# Altium PCB DataSampleHub.PcbDoc (part 1 of 3)
Units mil, origin at the board's own origin, x right, y up, seen from the top; angles counter-clockwise.
Board outline 7885.07 x 6309.28 mil, 2 copper layers (Top Layer, Bottom Layer), stack 65.792 mil thick; 360 components, 225 nets, 1247 pads, 854 vias.
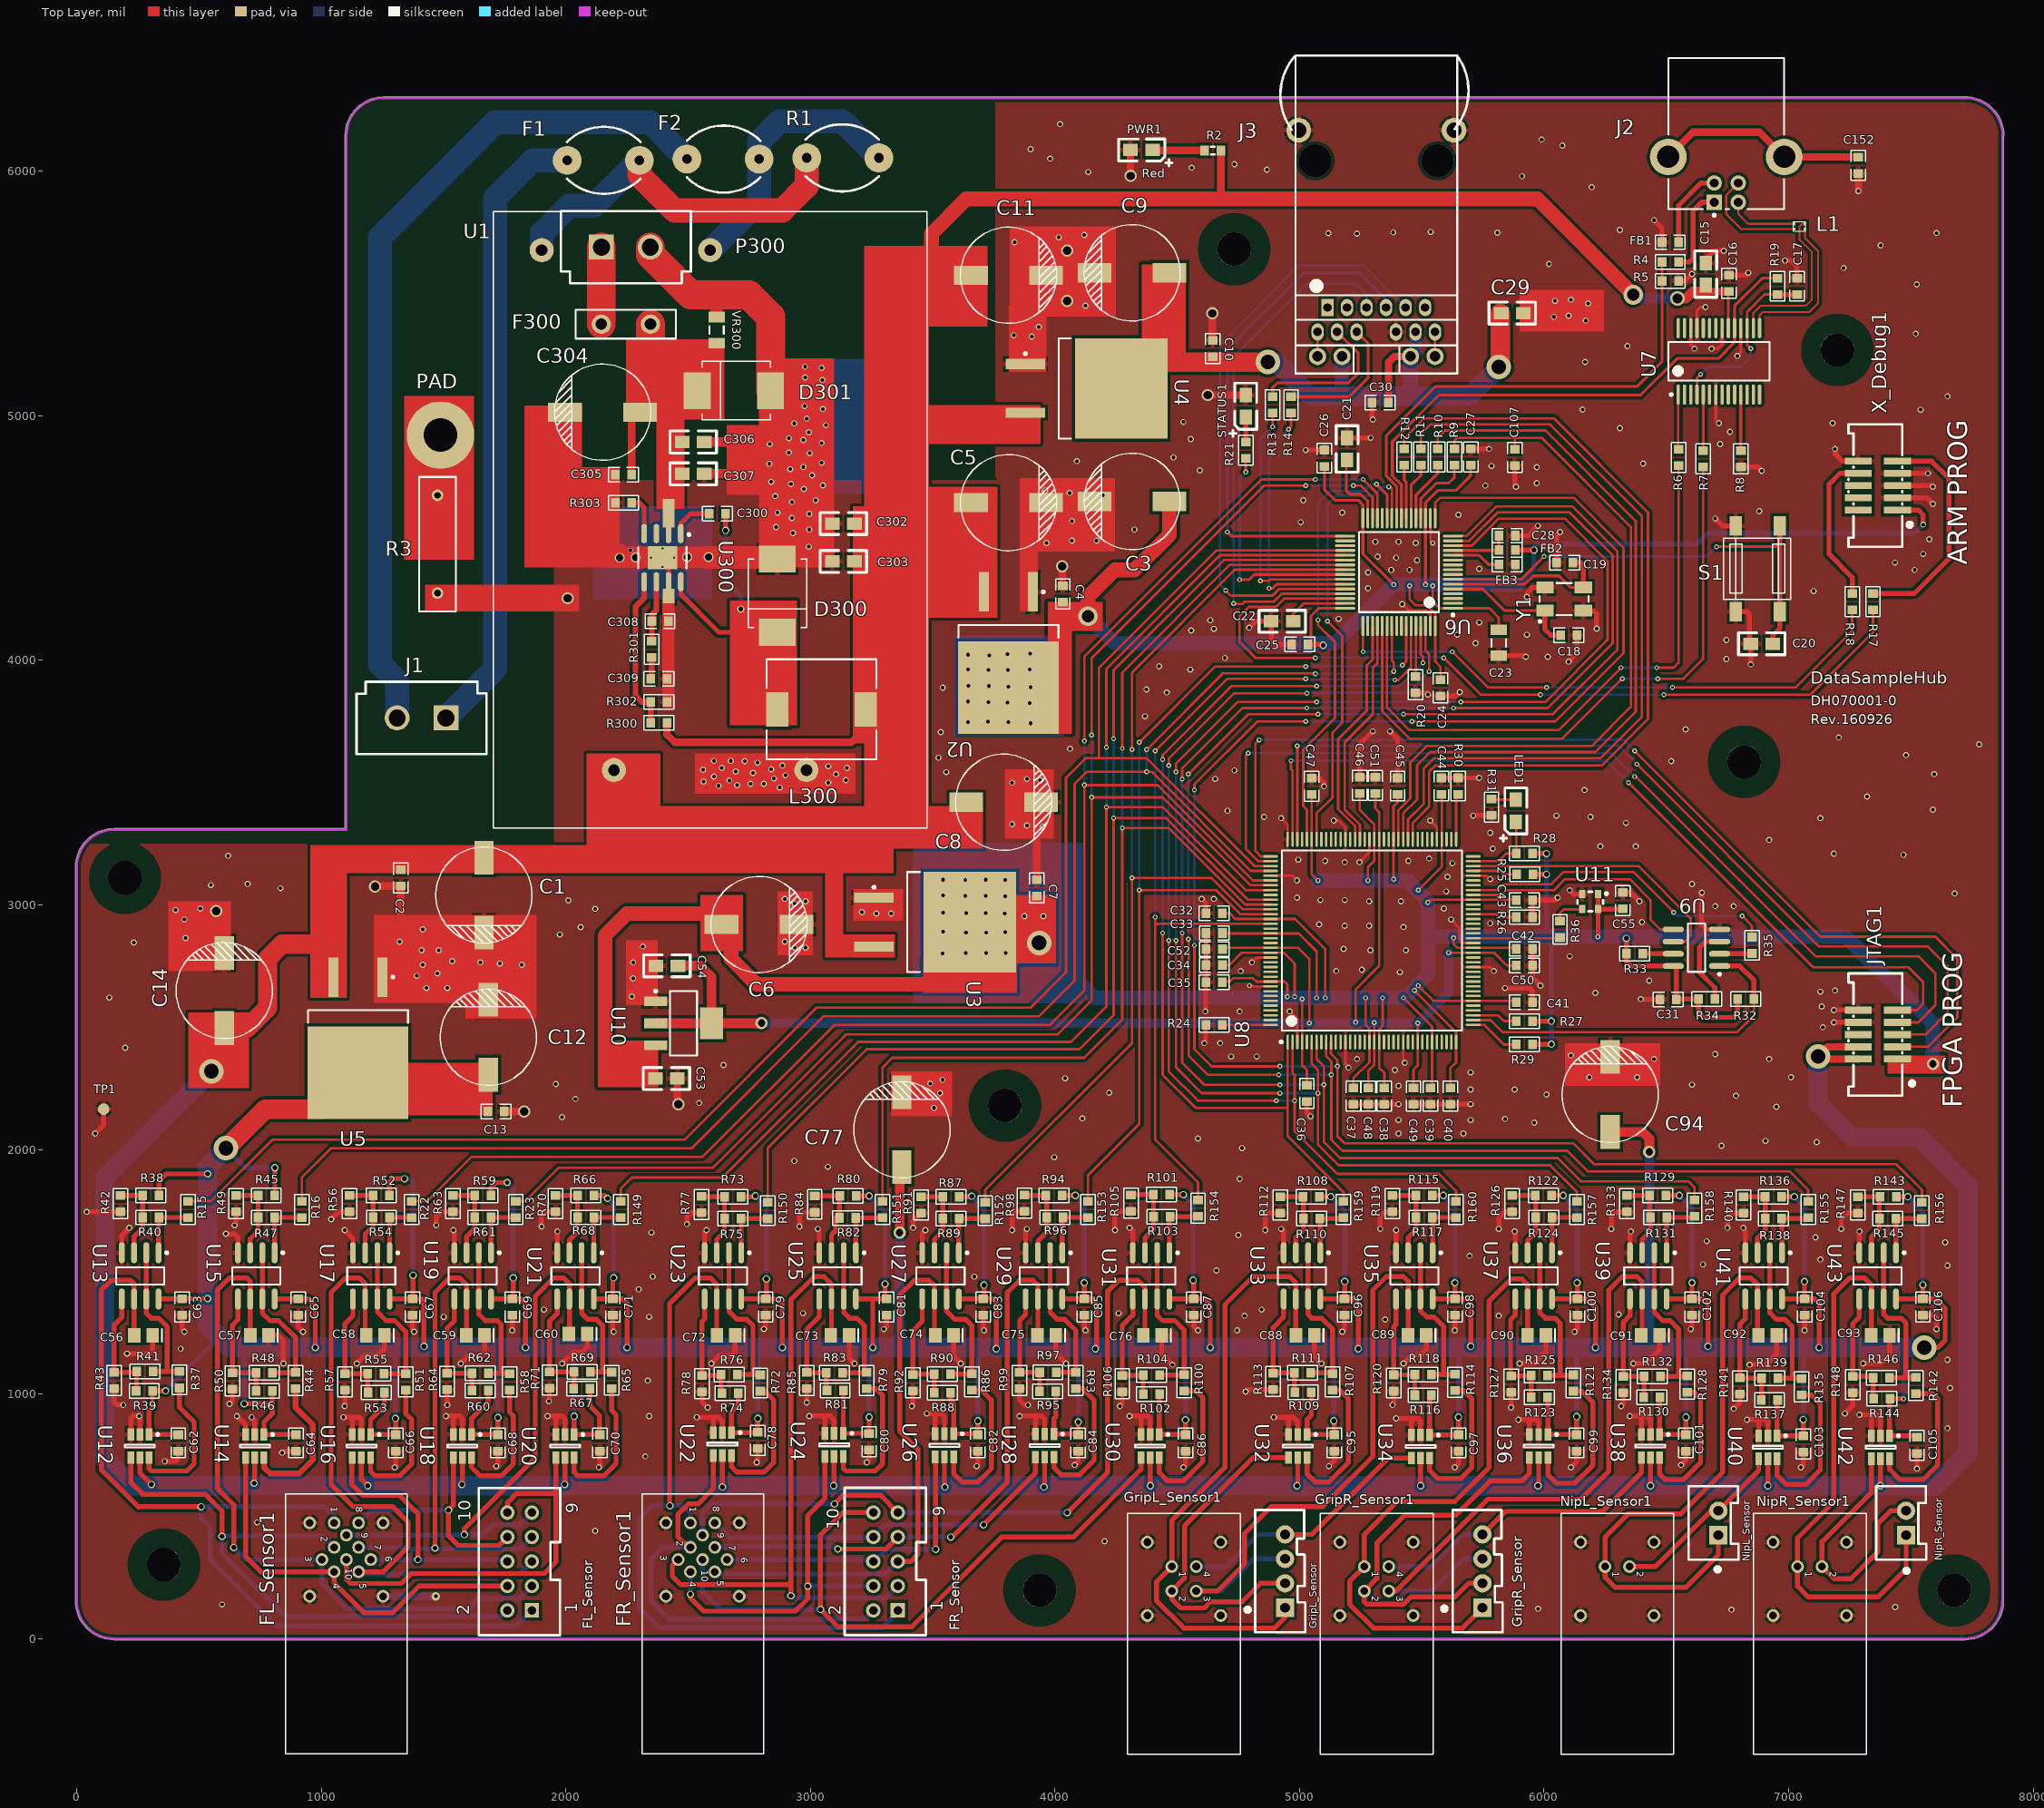
[diagram p0: Top Layer view]
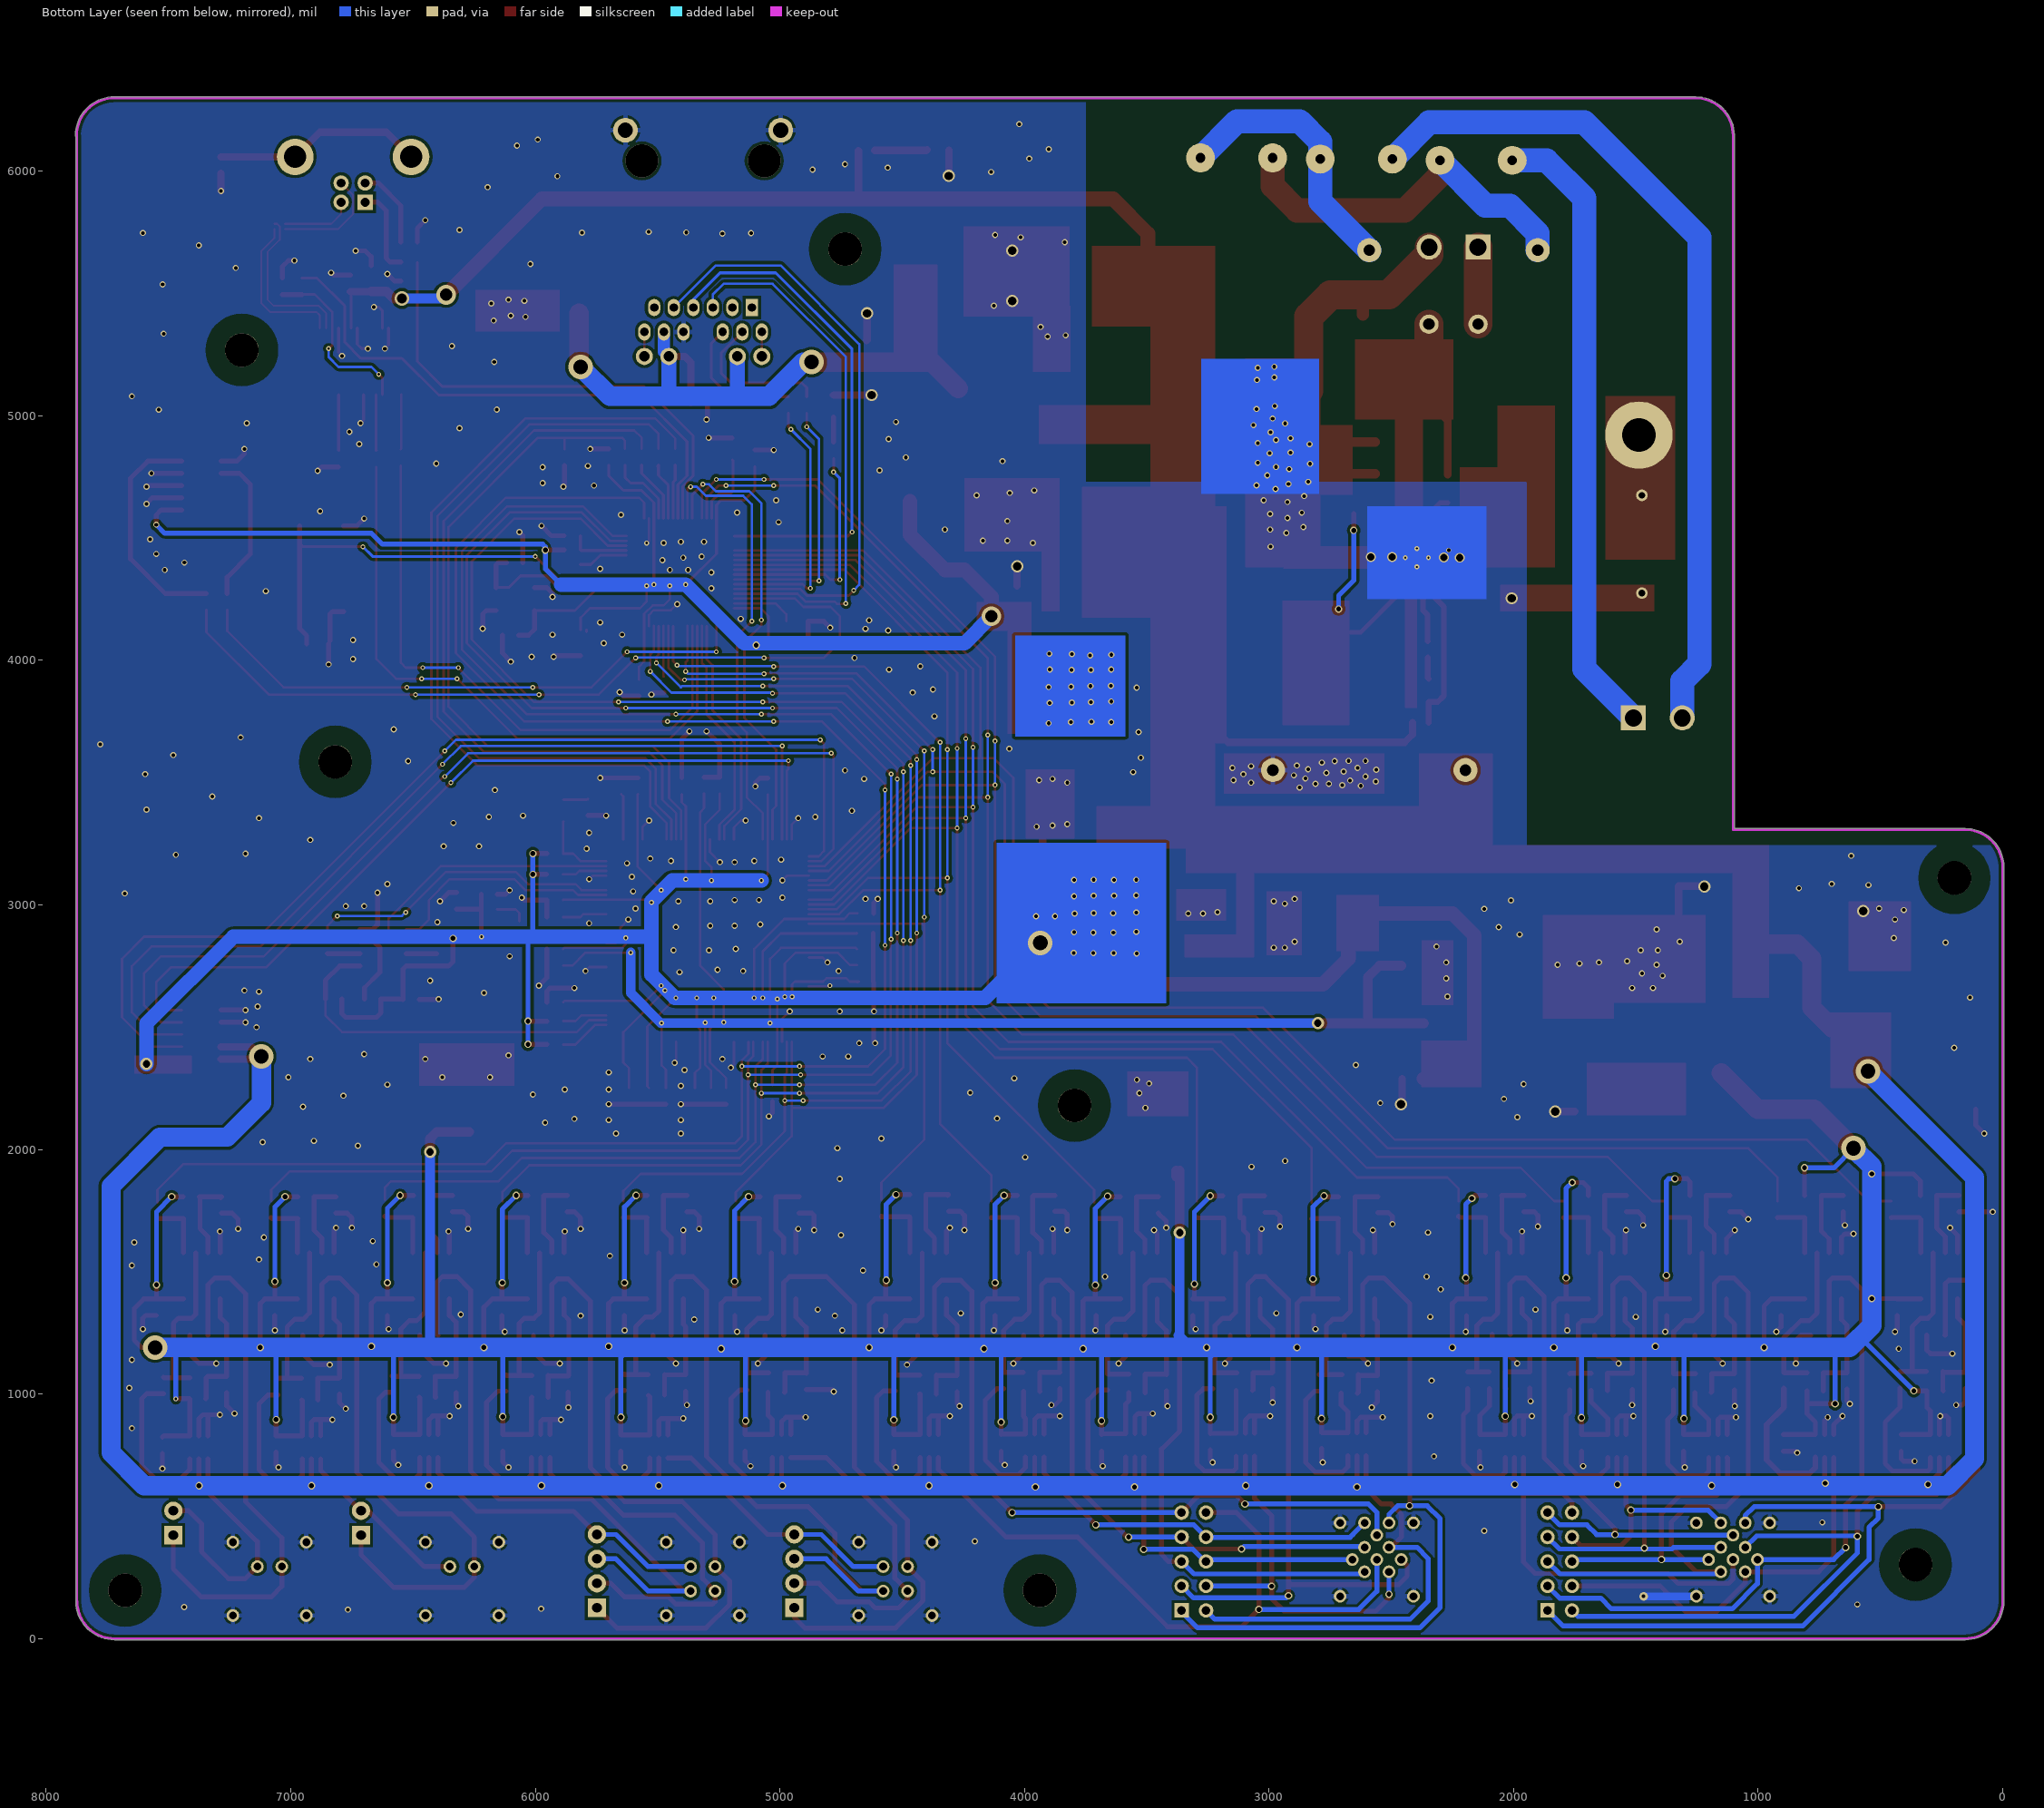
[diagram p1: Bottom Layer view, seen from below]

## Layer stack, top to bottom
Top Solder: solder mask 0.4, Solder Resist, Dk 3.5
Top Layer: signal copper 1.4
Dielectric1: core 62.9921, FR-4, Dk 4.8
Bottom Layer: signal copper 1.4
Bottom Solder: solder mask 0.4, Solder Resist, Dk 3.5

## Board outline
-5.04,152.5 cw(c-0.02,152.5) -5.01,152.95 -5.01,3152.56 cw(c0,3152.56) -4.86,3153.82 cw(c0.09,3154.67) -4.93,3154.67 cw(c152.61,3154.67) 152.61,3312.2 cw(c152.61,3307.19) 153.62,3312.1 1097.35,3312.1 1097.35,6146.69 cw(c1102.36,6146.69) 1097.47,6147.79 cw(c1255,6146.69) 1255,6304.23 7722.05,6304.23 cw(c7722.5,6299.23) 7722.5,6304.25 cw(c7722.5,6146.71) 7880.04,6146.71 cw(c7875.02,6146.71) 7879.03,6143.7 7879.03,152.52 cw(c7874.02,152.52) 7878.52,150.32 cw(c7721,152.52) 7721,-5.01 cw(c7721,0) 7720.92,-5.01 152.96,-5.01 cw(c152.5,-0.02) 152.5,-5.04 cw(c152.5,152.5)

## Design rules (kind name [scope] priority, off if disabled: settings)
Clearance Poly_NoNet [IsPAD and Not InNet('') and Not InAnyComponent] p1: gap=78.74
Clearance Clearance_1 [All] p2: gap=7
Height [All] p1: minheight=0 maxheight=2000 prefheight=500
HoleSize [All] p1: absolutevalues=TRUE maxlimit=2000 minlimit=1 maxpercent=80.000 minpercent=20.000
MinimumSolderMaskSliver [All] p1: minsoldermaskwidth=0.39
PlaneConnect [All] p1: planeconnectstyle=Direct reliefexpansion=20 reliefentries=4 reliefconductorwidth=10 reliefairgap=10
PolygonConnect PolygonConnect_1 [IsVia] p1: connectstyle=Direct reliefconductorwidth=10 reliefentries=4 polygonreliefangle="90 Angle" airgapwidth=10
PolygonConnect [All] p2: connectstyle=Relief reliefconductorwidth=19.68 reliefentries=4 polygonreliefangle="90 Angle" airgapwidth=10
RoutingVias [All] p1: holewidth=15 width=20 viastyle="Through Hole" minholewidth=15 minwidth=15 maxholewidth=80 maxwidth=100
SilkToSilkClearance [All] p1: silktosilkclearance=0
SilkToSolderMaskClearance [IsPad] p1: minsilkscreentomaskgap=0 clearancetoexposedcopper=TRUE
SolderMaskExpansion [All] p1: expansion=4
Width [All] p1: maxlimit=393.7 minlimit=3.94 preferedwidth=20 bottomlayer_minwidth=10 minimp=50.000000 maximp=50.000000 favimp=50.000000
24 further rules are at their usual default settings.

## Classes and differential pairs
net class NIPR_CON[0..3]: NIPR_CON0 NIPR_CON1 NIPR_CON2 NIPR_CON3
net class NIPL_CON[0..3]: NIPL_CON0 NIPL_CON1 NIPL_CON2 NIPL_CON3
net class GRIPR_SENSOR[1..2]: GRIPR_SENSOR1 GRIPR_SENSOR2
net class GRIPR_CON[0..3]: GRIPR_CON0 GRIPR_CON1 GRIPR_CON2 GRIPR_CON3
net class GRIPL_SENSOR[1..2]: GRIPL_SENSOR1 GRIPL_SENSOR2
net class GRIPL_CON[0..3]: GRIPL_CON0 GRIPL_CON1 GRIPL_CON2 GRIPL_CON3
net class FR_SENSOR[1..5]: FR_SENSOR1 FR_SENSOR2 FR_SENSOR3 FR_SENSOR4 FR_SENSOR5
net class FR_CON[0..9]: FR_CON0 FR_CON1 FR_CON2 FR_CON3 FR_CON4 FR_CON5 FR_CON6 FR_CON7 FR_CON8 FR_CON9
net class FL_SENSOR[1..5]: FL_SENSOR1 FL_SENSOR2 FL_SENSOR3 FL_SENSOR4 FL_SENSOR5
net class FL_CON[0..9]: FL_CON0 FL_CON1 FL_CON2 FL_CON3 FL_CON4 FL_CON5 FL_CON6 FL_CON7 FL_CON8 FL_CON9
component class GripNip_SENSORS: C88 C89 C90 C91 C92 C93 C94 C95 C96 C97 C98 C99 C100 C101 C102 C103 C104 C105 C106 R107 R108 R109 R110 R111 R112 R113 R114 R115 R116 R117 R118 R119 R120 R121 R122 R123 R124 R125 R126 R127 R128 R129 R130 R131 R132 R133 R134 R135 R136 R137 R138 R139 R140 R141 R142 R143 R144 R145 R146 R147 R148 R155 R156 R157 R158 R159 R160 U32 U33 U34 U35 U36 U37 U38 U39 U40 U41 U42 U43
component class FR_SENSORS: C72 C73 C74 C75 C76 C77 C78 C79 C80 C81 C82 C83 C84 C85 C86 C87 R72 R73 R74 R75 R76 R77 R78 R79 R80 R81 R82 R83 R84 R85 R86 R87 R88 R89 R90 R91 R92 R93 R94 R95 R96 R97 R98 R99 R100 R101 R102 R103 R104 R105 R106 R150 R151 R152 R153 R154 U22 U23 U24 U25 U26 U27 U28 U29 U30 U31
component class FL_SENSORS: C56 C57 C58 C59 C60 C62 C63 C64 C65 C66 C67 C68 C69 C70 C71 R15 R16 R22 R23 R37 R38 R39 R40 R41 R42 R43 R44 R45 R46 R47 R48 R49 R50 R51 R52 R53 R54 R55 R56 R57 R58 R59 R60 R61 R62 R63 R64 R65 R66 R67 R68 R69 R70 R71 R149 U12 U13 U14 U15 U16 U17 U18 U19 U20 U21
component class COUNTER: C31 C32 C33 C34 C35 C36 C37 C38 C39 C40 C41 C42 C43 C44 C45 C46 C47 C48 C49 C50 C51 C52 C53 C54 C55 C107 IC1 JTAG1 LED1 R24 R25 R26 R27 R28 R29 R30 R31 R32 R33 R34 R35 R36 U8 U9 U10 U11
component class Connectors: C152 FB1 FL_Sensor FL_Sensor1 FR_Sensor FR_Sensor1 GripL_Sensor GripL_Sensor1 GripR_Sensor GripR_Sensor1 J2 L1 NipL_Sensor NipL_Sensor1 NipR_Sensor NipR_Sensor1 P5 R4 R5
component class CONTROLLER: C15 C16 C17 C18 C19 C20 C21 C22 C23 C24 C25 C26 C27 C28 C29 C30 FB2 FB3 J3 R6 R7 R8 R9 R10 R11 R12 R13 R14 R17 R18 R19 R20 R21 S1 STATUS1 U6 U7 X_Debug1 Y1
component class POWER: C1 C2 C3 C4 C5 C6 C7 C8 C9 C10 C11 C12 C13 C14 C300 C302 C303 C304 C305 C306 C307 C308 C309 D300 D301 F1 F2 F300 J1 L300 P300 PAD PWR1 R1 R2 R3 R300 R301 R302 R303 TP1 U1 U2 U3 U4 U5 U300 VR300

## Components (designator, comment, footprint, x,y, rotation, side; value= is the part's Value field where it differs from the comment)
C1 "150μF" UWT1E471MNL1GS 1665,3040 r270 top
C2 "0603" C0603 1325,3110 r90 top
C3 "150μF" UWT1E471MNL1GS 4315,4650 r180 top
C4 "Cap" C0603 4032,4271 r270 top
C5 "47μF" UWT1E471MNL1GS 3810,4645 r0 top
C6 "150μF" UWT1E471MNL1GS 2790,2920 r0 top
C7 "Cap" C0603 3925,3070 r270 top
C8 "47μF" UWT1E471MNL1GS 3790,3420 r0 top
C9 "150μF" UWT1E471MNL1GS 4315,5585 r180 top
C10 "Cap" C0603 4645,5275 r270 top
C11 "47μF" UWT1E471MNL1GS 3810,5575 r0 top
C12 "150μF" UWT1E471MNL1GS 1683,2459 r90 top
C13 "Cap" C0603 1715,2155 r180 top
C14 "47μF" UWT1E471MNL1GS 603,2650 r90 top
C15 "Cap" 0805A 6661.16,5624.99 r270 top
C16 "Cap" C0603 6756,5542 r90 top
C17 "Cap" C0603 7035,5530 r90 top
C18 "Cap" C0603 6101,4103 r180 top
C19 "Cap" C0603 6085,4400 r180 top
C20 "Cap" 0805a 6935,4068 r180 top
C21 "Cap" 0805a 5195,4820 r90 top
C22 "Cap" 0805a 4974,4160 r180 top
C23 "0603" C1206 5815,4072 r270 top
C24 "Cap" C0603 5576,3888 r270 top
C25 "Cap" C0603 5002,4065 r180 top
C26 "Cap" C0603 5102,4827 r90 top
C27 "Cap" C0603 5700,4832 r90 top
C28 "Cap" C0603 5849,4510 r0 top
C29 "Cap" 0805A 5915,5420 r180 top
C30 "Cap" C0603 5330,5055 r0 top
C31 "0603" C0603 6507,2614 r0 top
C32 "0603" C0603 4650,2966 r0 top
C33 "0603" C0603 4651.54,2885 r0 top
C34 "0603" C0603 4651.54,2754 r0 top
C35 "0603" C0603 4650,2684 r0 top
C36 "0603" C0603 5030,2230 r90 top
C37 "0603" C0603 5220,2218 r90 top
C38 "0603" C0603 5347,2218 r90 top
C39 "0603" C0603 5535,2218 r90 top
C40 "0603" C0603 5617,2218 r90 top
C41 "0603" C0603 5919,2602 r180 top
C42 "0603" C0603 5919,2820 r180 top
C43 "0603" C0603 5920,3020 r180 top
C44 "0603" C0603 5580,3486 r270 top
C45 "0603" C0603 5401,3486 r270 top
C46 "0603" C0603 5246,3488.46 r270 top
C47 "0603" C0603 5050,3485 r270 top
C48 "0603" C0603 5281,2218 r90 top
C49 "0603" C0603 5466,2218 r90 top
C50 "0603" C0603 5919,2752 r180 top
C51 "0603" C0603 5310,3488.46 r270 top
C52 "0603" C0603 4651.54,2819 r0 top
C53 "0805" 0805A 2456,2290 r180 top
C54 "0805" 0805A 2368,2751 r0 top
C55 "0603" C0603 6322,3017 r270 top
C56 "Cap" 0805 273,1240 r180 top
C57 "Cap" 0805 747,1240 r180 top
C58 "Cap" 0805 1221,1240 r180 top
C59 "Cap" 0805 1630,1240 r180 top
C60 "Cap" 0805 2050,1245 r180 top
C62 "Cap" C0603 415,800 r90 top
C63 "Cap" C0603 431,1355 r90 top
C64 "Cap" C0603 897,800 r90 top
C65 "Cap" C0603 906,1355 r90 top
C66 "Cap" C0603 1304,800 r90 top
C67 "Cap" C0603 1373,1355 r90 top
C68 "Cap" C0603 1722,800 r90 top
C69 "Cap" C0603 1781,1355 r90 top
C70 "Cap" C0603 2138.54,800 r90 top
C71 "Cap" C0603 2192,1355 r90 top
C72 "Cap" 0805 2655,1240 r180 top
C73 "Cap" 0805 3121,1240 r180 top
C74 "Cap" 0805 3548,1240 r180 top
C75 "Cap" 0805 3966,1240 r180 top
C76 "Cap" 0805 4399,1240 r180 top
C77 "150μF" UWT1E471MNL1GS 3374,2081 r90 top
C78 "Cap" C0603 2785,810 r90 top
C79 "Cap" C0603 2817,1355 r90 top
C80 "Cap" C0603 3240,805 r90 top
C81 "Cap" C0603 3311,1355 r90 top
C82 "Cap" C0603 3685,800 r90 top
C83 "Cap" C0603 3707,1355 r90 top
C84 "Cap" C0603 4095,800 r90 top
C85 "Cap" C0603 4120,1355 r90 top
C86 "Cap" C0603 4534,800 r90 top
C87 "Cap" C0603 4567,1355 r90 top
C88 "Cap" 0805 5023,1240 r180 top
C89 "Cap" 0805 5481,1240 r180 top
C90 "Cap" 0805 5970,1240 r180 top
C91 "Cap" 0805 6435,1240 r180 top
C92 "Cap" 0805 6914,1240 r180 top
C93 "Cap" 0805 7375,1240 r180 top
C94 "150μF" UWT1E471MNL1GS 6270,2225 r90 top
C95 "Cap" C0603 5142,800 r90 top
C96 "Cap" C0603 5184,1355 r90 top
C97 "Cap" C0603 5650,800 r90 top
C98 "Cap" C0603 5636,1355 r90 top
C99 "Cap" C0603 6133,800 r90 top
C100 "Cap" C0603 6136,1355 r90 top
C101 "Cap" C0603 6580,800 r90 top
C102 "Cap" C0603 6605,1355 r90 top
C103 "Cap" C0603 7060,795 r90 top
C104 "Cap" C0603 7066,1355 r90 top
C105 "Cap" C0603 7525,790 r90 top
C106 "Cap" C0603 7549,1355 r90 top
C107 "0603" C0603 5880,4830 r90 top
C152 "0603" C0603 7285,6025 r90 top
C300 "Cap" C0603 2620,4600 r180 top
C302 "Cap" 0805A 3090,4560 r0 top
C303 "Cap" 0805A 3090,4405 r0 top
C304 "150μF" UWT1E471MNL1GS 2150,5015 r180 top
C305 "Cap" C0603 2235,4760 r0 top
C306 "Cap" 0805A 2566,4893 r180 top
C307 "Cap" 0805A 2566,4763 r180 top
C308 "Cap" C0603 2385,4160 r180 top
C309 "Cap" C0603 2380,3925 r180 top
D300 "B560C-13-F" DIODE_SMC 2865,4265 r90 top
D301 "B560C-13-F" DIODE_SMC 2687,5103 r0 top
F1 "Fuse/1A" Piezoresistor 2005,6045 r0 top
F2 "Fuse/1A" Piezoresistor 2495,6050 r0 top
F300 "LFUS-16R500G" LFUS-16R500G 2145,5375 r0 top
FB1 "MPZ1608S181A" C0603 6516,5710 r0 top
FB2 "MPZ1608S181A" C0603 5849,4451 r180 top
FB3 "MPZ1608S181A" C0603 5849,4392 r0 top
FL_Sensor "Header 5X2" 2*5DIP2.54 1811.02,314.96 r90 top locked
FL_Sensor1 "EXG.1B.310.HLN" EXG.1B.310.HLN 1102.36,322.83 r270 top locked
FR_Sensor "Header 5X2" 2*5DIP2.54 3307.09,315 r90 top locked
FR_Sensor1 "EXG.1B.310.HLN" EXG.1B.310.HLN 2559.06,322.83 r270 top locked
GripL_Sensor "Header 4" XH2.54-4PIN 4940.94,275.59 r90 top
GripL_Sensor1 "EXG.0B.304.HLN" EXG.0B.304.HLN 4527.56,244.09 r270 top locked
GripR_Sensor "Header 4" XH2.54-4PIN 5748.03,275.59 r90 top
GripR_Sensor1 "EXG.0B.304.HLN" EXG.0B.304.HLN 5314.96,244.09 r270 top locked
J1 "HX50800-2" HX50800-2 1410,3765 r270 top
J2 "FCI 61729-1010BLF" 787780 6745,5913 r90 top locked
J3 "USR-K" USR-K 5114,5443 r90 top locked
JTAG1 "Gadgeteer Socket" SHF-105-01-L-D-SM 7365,2470 r90 top
L1 "DLP11SN900HL2#" DLP11SN900HL2# 7020,5755 r0 top
L300 "7443330820" WE-HCC-1090 3045,3800 r0 top
LED1 "Red" 0805aLED 5885,3385 r90 top
NipL_Sensor "Header 2" XH2.54-2P 6712.6,472.44 r90 top locked
NipL_Sensor1 "EXG.0B.302.HLN" EXG.0B.302.HLN 6299.21,244.09 r270 top locked
NipR_Sensor "Header 2" XH2.54-2P 7480.31,472.44 r90 top locked
NipR_Sensor1 "EXG.0B.302.HLN" EXG.0B.302.HLN 7086.61,244.09 r270 top locked
P300 "HX50800-2" HX50800-2 2245,5690 r90 top
PAD "" PAD 1496,4413 r270 top
PWR1 "Red" 0805aLED 4354,6087 r180 top
R1 "Voltage-Sensitive Resistor" Piezoresistor 3280,6055 r180 top
R2 "0603" RESC1608N 4645,6085 r0 top
R3 "0603" RAD-0.4 1475,4475 r270 top
R4 "0603" R0603 6516,5629 r180 top
R5 "0603" R0603 6516,5552 r180 top
R6 "0603" R0603 6550,4830 r90 top
R7 "0603" R0603 6650,4825 r90 top
R8 "0603" R0603 6805,4825 r270 top
R9 "0603" R0603 5633.29,4832 r90 top
R10 "0603" R0603 5564.94,4832 r90 top
R11 "0603" R0603 5496.58,4832 r90 top
R12 "0603" R0603 5428.23,4832 r90 top
R13 "0603" R0603 4890,5045 r270 top
R14 "0603" R0603 4965,5045 r270 top
R15 "" R0603 455,1755 r90 top
R16 "" R0603 920,1755 r90 top
R17 "0603" R0603 7345,4240 r90 top
R18 "0603" R0603 7260,4240 r90 top
R19 "0603" R0603 6955,5530 r270 top
R20 "0603" R0603 5475,3900 r270 top
R21 "0603" R0603 4780,4860 r270 top
R22 "" R0603 1370,1755 r90 top
R23 "" R0603 1795,1755 r90 top
R24 "0603" R0603 4650,2510 r0 top
R25 "0603" R0603 5921.54,3125 r180 top
R26 "0603" R0603 5920,2950 r180 top
R27 "0603" R0603 5920,2525 r180 top
R28 "0603" R0603 5920,3210 r0 top
R29 "0603" R0603 5919,2429 r0 top
R30 "0603" R0603 5649,3486 r270 top
R31 "0603" R0603 5785,3400 r90 top
R32 "0603" R0603 6825,2615 r180 top
R33 "0603" R0603 6370,2800 r180 top
R34 "0603" R0603 6665,2615 r180 top
R35 "0603" R0603 6850,2835 r90 top
R36 "0603" R0603 6065,2900 r90 top
R37 "0603" R0603 420,1058 r90 top
R38 "" R0603 303,1812 r0 top
R39 "1%" R0603 276,1013 r0 top
R40 "" R0603 303,1722 r0 top
R41 "1%" R0603 278,1093 r0 top
R42 "" R0603 179,1778 r90 top
R43 "1%" R0603 153,1055 r90 top
R44 "0603" R0603 895,1055 r90 top
R45 "" R0603 775,1812 r0 top
R46 "1%" R0603 766,1012 r0 top
R47 "" R0603 775,1722 r0 top
R48 "1%" R0603 766,1087 r0 top
R49 "" R0603 652,1778 r90 top
R50 "1%" R0603 637,1053 r90 top
R51 "0603" R0603 1345,1049 r90 top
R52 "" R0603 1245,1812 r0 top
R53 "1%" R0603 1225,1006 r0 top
R54 "" R0603 1246,1722 r0 top
R55 "1%" R0603 1223,1083 r0 top
R56 "" R0603 1115,1778 r90 top
R57 "1%" R0603 1096,1049 r90 top
R58 "0603" R0603 1770,1049 r90 top
R59 "" R0603 1661,1812 r0 top
R60 "1%" R0603 1649,1014 r0 top
R61 "" R0603 1661,1722 r0 top
R62 "1%" R0603 1650,1085 r0 top
R63 "" R0603 1538,1778 r90 top
R64 "1%" R0603 1514,1051 r90 top
R65 "0603" R0603 2187.54,1056 r90 top
R66 "" R0603 2082,1812 r0 top
R67 "1%" R0603 2064.54,1022 r0 top
R68 "" R0603 2081,1722 r0 top
R69 "1%" R0603 2066.54,1091 r0 top
R70 "" R0603 1958,1778 r90 top
R71 "1%" R0603 1933.54,1057 r90 top
R72 "0603" R0603 2795,1045 r90 top
R73 "" R0603 2682,1807 r0 top
R74 "1%" R0603 2672,1003 r0 top
R75 "" R0603 2682,1717 r0 top
R76 "1%" R0603 2668,1080 r0 top
R77 "" R0603 2555,1775 r90 top
R78 "1%" R0603 2556,1042 r90 top
R79 "0603" R0603 3230,1055 r90 top
R80 "" R0603 3154.54,1810 r0 top
R81 "1%" R0603 3101,1015 r0 top
R82 "" R0603 3151.54,1720 r0 top
R83 "1%" R0603 3098,1087 r0 top
R84 "" R0603 3017.54,1776 r90 top
R85 "1%" R0603 2985,1055 r90 top
R86 "0603" R0603 3660,1050 r90 top
R87 "" R0603 3575,1807 r0 top
R88 "1%" R0603 3539,1005 r0 top
R89 "" R0603 3575,1717 r0 top
R90 "1%" R0603 3539,1081 r0 top
R91 "" R0603 3453,1773 r90 top
R92 "1%" R0603 3419,1046 r90 top
R93 "0603" R0603 4085,1055 r90 top
R94 "" R0603 3996,1812 r0 top
R95 "1%" R0603 3970,1010 r0 top
R96 "" R0603 3999,1722 r0 top
R97 "1%" R0603 3971,1089 r0 top
R98 "" R0603 3875,1780 r90 top
R99 "1%" R0603 3855,1055 r90 top
R100 "0603" R0603 4528,1046 r90 top
R101 "" R0603 4435,1815 r0 top
R102 "1%" R0603 4394,1000 r0 top
R103 "" R0603 4436.54,1725 r0 top
R104 "1%" R0603 4394,1078 r0 top
R105 "" R0603 4310.54,1781 r90 top
R106 "1%" R0603 4275,1042 r90 top
R107 "0603" R0603 5135,1050 r90 top
R108 "" R0603 5048,1807 r0 top
R109 "1%" R0603 5015,1007 r0 top
R110 "" R0603 5050,1717 r0 top
R111 "1%" R0603 5013,1087 r0 top
R112 "" R0603 4921,1773 r90 top
R113 "1%" R0603 4892,1051 r90 top
R114 "0603" R0603 5636,1048 r90 top
R115 "" R0603 5509,1812 r0 top
R116 "1%" R0603 5505,995 r0 top
R117 "" R0603 5509,1722 r0 top
R118 "1%" R0603 5505,1080 r0 top
R119 "" R0603 5379,1778 r90 top
R120 "1%" R0603 5385,1045 r90 top
R121 "0603" R0603 6120,1045 r90 top
R122 "" R0603 5997,1812 r0 top
R123 "1%" R0603 5980,986 r0 top
R124 "" R0603 5999,1722 r0 top
R125 "1%" R0603 5981,1075 r0 top
R126 "" R0603 5870,1778 r90 top
R127 "1%" R0603 5865,1040 r90 top
R128 "0603" R0603 6585,1040 r90 top
R129 "" R0603 6465,1812 r0 top
R130 "1%" R0603 6441,986 r0 top
R131 "" R0603 6469,1722 r0 top
R132 "1%" R0603 6443,1072 r0 top
R133 "" R0603 6339,1778 r90 top
R134 "1%" R0603 6324,1039 r90 top
R135 "0603" R0603 7053,1029 r90 top
R136 "" R0603 6937,1807 r0 top
R137 "1%" R0603 6922,976 r0 top
R138 "" R0603 6938,1717 r0 top
R139 "1%" R0603 6923,1064 r0 top
R140 "" R0603 6816,1773 r90 top
R141 "1%" R0603 6801,1033 r90 top
R142 "0603" R0603 7520,1035 r90 top
R143 "" R0603 7406.54,1807 r0 top
R144 "1%" R0603 7381,981 r0 top
R145 "" R0603 7404.54,1717 r0 top
R146 "1%" R0603 7379,1067 r0 top
R147 "" R0603 7283.54,1773 r90 top
R148 "1%" R0603 7262,1039 r90 top
R149 "" R0603 2225,1755 r90 top
R150 "" R0603 2825,1750 r90 top
R151 "" R0603 3295,1755 r90 top
R152 "" R0603 3715,1750 r90 top
R153 "" R0603 4135,1755 r90 top
R154 "" R0603 4585,1760 r90 top
R155 "" R0603 7080,1755 r90 top
R156 "" R0603 7545,1750 r90 top
R157 "" R0603 6135,1755 r90 top
R158 "" R0603 6615,1760 r90 top
R159 "" R0603 5180,1755 r90 top
R160 "" R0603 5640,1755 r90 top
R300 "0603" R0603 2380,3745 r0 top
R301 "0603" R0603 2350,4045 r90 top
R302 "0603" R0603 2380,3830 r180 top
R303 "0603" R0603 2235,4645 r0 top
S1 "DTSM-6" reset 6784,4550 r0 top
STATUS1 "Green" 0805aLED 4780,5040 r90 top
TP1 "Test Point" TestPoint 110,2165 r90 top
U1 "AVC-5S" ATC30-5S 2590,4575 r270 top
U2 "LD1085D2T33R" TO-263_M 3809.8,4030 r270 top
U3 "LD1085D2T33R" TO-263_M 3510,2930 r0 top
U4 "LD1085D2T33R" TO-263_M 4129,5112 r0 top
U5 "LD1085D2T33R" TO-263_M 1150,2455 r270 top
U6 "STM32F405RGT6" STM-LQFP64_M 5407,4361 r180 top
U7 "FT232RL" SSOP-28_N 6715,5223 r90 top
U8 "XC6SLX9-2TQG144C" TQG144_L 5296,2854 r90 top
U9 "M25P16_SO8" SO8_N 6623,2825 r180 top
U10 "TLV1117LV12DCYR" SOT223_N 2481,2516 r0 top
U11 "ASDMB-50.000MHZ-LC-T" ASDMB-32.000MHZ-LC-T 6221,3044 r180 top
U12 "TS5A3159" SOT23-6_M 258,787 r270 top
U13 "TLC3702I" LT-S8-8_N 259.27,1483 r270 top
U14 "TS5A3159" SOT23-6_M 728,787 r270 top
U15 "TLC3702I" LT-S8-8_N 734,1483 r270 top
U16 "TS5A3159" SOT23-6_M 1164,787 r270 top
U17 "TLC3702I" LT-S8-8_N 1204.27,1483 r270 top
U18 "TS5A3159" SOT23-6_M 1576.73,787 r270 top
U19 "TLC3702I" LT-S8-8_N 1619,1483 r270 top
U20 "TS5A3159" SOT23-6_M 1996.54,787 r270 top
U21 "TLC3702I" LT-S8-8_N 2039.27,1483 r270 top
U22 "TS5A3159" SOT23-6_M 2640,795 r270 top
U23 "TLC3702I" LT-S8-8_N 2642,1483 r270 top
U24 "TS5A3159" SOT23-6_M 3097,792 r270 top
U25 "TLC3702I" LT-S8-8_N 3111,1483 r270 top
U26 "TS5A3159" SOT23-6_M 3548,790 r270 top
U27 "TLC3702I" LT-S8-8_N 3532,1483 r270 top
U28 "TS5A3159" SOT23-6_M 3958,789 r270 top
U29 "TLC3702I" LT-S8-8_N 3955,1483 r270 top
U30 "TS5A3159" SOT23-6_M 4389,787 r270 top
U31 "TLC3702I" LT-S8-8_N 4393,1483 r270 top
U32 "TS5A3159" SOT23-6_M 4993,787 r270 top
U33 "TLC3702I" LT-S8-8_N 5010,1483 r270 top
U34 "TS5A3159" SOT23-6_M 5495,785 r270 top
U35 "TLC3702I" LT-S8-8_N 5469.27,1483 r270 top
U36 "TS5A3159" SOT23-6_M 5978,787 r270 top
U37 "TLC3702I" LT-S8-8_N 5957.27,1483 r270 top
U38 "TS5A3159" SOT23-6_M 6435,787 r270 top
U39 "TLC3702I" LT-S8-8_N 6426,1483 r270 top
U40 "TS5A3159" SOT23-6_M 6915,782 r270 top
U41 "TLC3702I" LT-S8-8_N 6898,1483 r270 top
U42 "TS5A3159" SOT23-6_M 7376,782 r270 top
U43 "TLC3702I" LT-S8-8_N 7364,1483 r270 top
U300 "TPS54560DDA" HSO-8_N 2395,4420 r270 top
VR300 "VC120626F540" C1206 2616,5351 r90 top
X_Debug1 "SHF-105-01-L-D-SM" SHF-105-01-L-D-SM 7365,4715 r90 top
Y1 "ABM3B-12.000MHZ-10-1-U-T" XTAL_ABRACON_ABM3B 6082,4251 r90 top

## Footprints (in the part's own frame and the unit in brackets; to place one, negate y for a bottom-side part, rotate by r counter-clockwise, add the part's x,y. Pads: shape width x height; smd on the part's side, far side on the other; paste and mask are expansions set on the pad)
2*5DIP2.54 [mm]
  rect 1.5x1.5 hole 0.9: 1(-5.08,-1.27)
  round 1.5 hole 0.9: 2(-5.08,1.27) 3(-2.54,-1.27) 4(-2.54,1.27) 5(0,-1.27) 6(0,1.27) 7(2.54,-1.27) 8(2.54,1.27) 9(5.08,-1.27) 10(5.08,1.27)
  silkscreen extent -7.65,-4.22 7.65,4.25
0805 [mm] "Chip Capacitor; Body 2.0 x 1.2 mm (LxW typ)"
  rect 1.3x1.5 smd: 1(-0.95,0) 2(0.95,0)
  silkscreen extent -1.9,-0.65 -1.9,0.65
0805A [mil]
  rect 60x50 smd: 1(0,0) 2(90,0)
  silkscreen extent -50,-45 140,45
0805a [mil]
  rect 60x50 smd: 1(0,0) 2(90,0)
  silkscreen extent -50,-45 140,45
0805aLED [mil]
  rect 60x50 smd: 1(-45,0) 2(45,0)
  silkscreen extent -125,-45 94,65
787780 [mm] "Connector; USB1.1, Type B, Thru-Hole; 4 Position; Right Angle"
  rect 1.6x1.6 hole 0.92: 1(-1,1.25)
  round 1.6 hole 0.92: 2(-1,-1.25) 3(1,-1.25) 4(1,1.25)
  round 3.8 hole 2.3: 5(3.71,6.02) 6(3.71,-6.02)
  silkscreen extent -2.47,-6.02 13.99,6.02
ASDMB-32.000MHZ-LC-T [mm]
  rect 0.65x0.85 smd: 1(0,0) 2(1.65,0) 3(1.65,1.55) 4(0,1.55)
  silkscreen extent -0.99,-0.25 2.16,1.78
ATC30-5S [mm] "AC-DC Body 64mm*45mm*23.5mm  4pin"
  round 2.5 hole 1.2: 1(-28,0) 2(-28,-17.5) 3(26,10) 4(26,-10)
  silkscreen extent -32,-22.5 32,22.5, body extent -32,-22.48 32,22.48, height 23.5
C0603 [mm]
  rect 0.9x1 smd: 1(-0.85,0) 2(0.85,0)
  silkscreen extent -1.55,-0.75 1.55,0.75, body extent -0.85,-0.48 0.85,0.48, height 0.6
C1206 [mm] "Chip Capacitor, Body 3.2x1.6mm, IPC High Density"
  rect 1.1x1.7 smd: 1(-1.35,0) 2(1.35,0)
  silkscreen extent -0.4,-0.75 0.4,0.75, body extent -1.7,-0.9 1.7,0.9, height 1.3
DIODE_SMC [mil] "Diode; 2 Leads"
  rect 110x150 smd: 1(-150,0) 2(150,0)
  silkscreen extent -130,-120 150,120
DLP11SN900HL2# [mm]
  rect 0.25x0.3 smd: 1(0.075,0.775) 2(1.175,0.775) 3(1.175,0.225) 4(0.075,0.225)
  silkscreen extent 0,0 1.25,1
EXG.0B.302.HLN [mil] "Socket, Female, Body 9mm dia. Height 10.5 mm, Through hole"
  round 52 hole 32: 1(-50,-50) 2(-50,50) 4(-150,-150) 5(150,-150) 6(150,150) 7(-150,150)
  silkscreen extent -268,-230 717,231, body extent -260,-246 724,246, height 508
EXG.0B.304.HLN [mil] "Socket, Female, Body 9mm dia. Height 10.5 mm, Through hole"
  round 52 hole 32: 1(-50,-50) 2(50,-50) 3(50,50) 4(-50,50) 6(-150,-150) 7(150,-150) 8(150,150) 9(-150,150)
  silkscreen extent -268,-230 717,231, body extent -260,-246 724,246, height 508
EXG.1B.310.HLN [mil] "Socket, Female, Body 11mm dia. Height 14 mm, Through hole"
  round 52 hole 32: 1(-150,-50) 2(-50,-50) 3(0,-100) 4(50,-50) 5(50,50) 6(0,100) 7(-50,50) 8(-150,50) 9(-100,0) 10(0,0) 12(-150,-150) 13(150,-150) 14(150,150) 15(-150,150)
  silkscreen extent -268,-248 795,249, body extent -259,-314 835,314, height 611
HSO-8_N [mm] "SOIC, 8-Leads, Body 4.9x3.9mm, Pitch 1.27mm, Thermal Pad, IPC Medium Density"
  oval 2x0.6 smd: 1(-2.5,1.905) 2(-2.5,0.635) 3(-2.5,-0.635) 4(-2.5,-1.905) 5(2.5,-1.905) 6(2.5,-0.635) 7(2.5,0.635) 8(2.5,1.905)
  rect 2.4x3.1 smd paste-1.2: 9(0,0)
  silkscreen extent -2.52,-2.5 1.1,2.88, body extent -2,-2.5 2,2.5, height 1.75
HX50800-2 [mm]
  rect 2.6x2.6 hole 1.78: 1(0,2.54)
  round 2.6 hole 1.78: 2(0,-2.54)
  silkscreen extent -3.75,-6.75 3.75,6.75
LFUS-16R500G [mm]
  round 2 hole 1.2: 1(0,0) 2(5.1,0)
  silkscreen extent -2.67,-1.5 7.73,1.5
LT-S8-8_N [mm] "SOIC, 8-Leads, Body 5x4mm, Pitch 1.27mm, IPC Medium Density"
  oval 2.2x0.6 smd: 1(-2.4,1.905) 2(-2.4,0.635) 3(-2.4,-0.635) 4(-2.4,-1.905) 5(2.4,-1.905) 6(2.4,-0.635) 7(2.4,0.635) 8(2.4,1.905)
  silkscreen extent -2.52,-2.5 0.9,2.88, body extent -2,-2.5 2,2.5, height 1.76
PAD [mm]
  round 7 hole 3.5: 1(-12.913,-0.225)
Piezoresistor [mm]
  round 3 hole 1: 1(0,0) 2(7.5,0)
  silkscreen extent 0,-3.48 7.62,3.48
R0603 [mm]
  rect 0.9x1 smd: 1(-0.85,0) 2(0.85,0)
  silkscreen extent -1.55,-0.75 1.55,0.75, body extent -0.85,-0.48 0.85,0.48, height 0.6
RAD-0.4 [mm] "Radial Cap, Thru-Hole; 2 Leads; 0.4 in Pin Spacing"
  round 1.2 hole 0.7: 1(-5.08,0) 2(5.08,0)
  silkscreen extent -6.98,-1.91 6.99,1.91
RESC1608N [mm] "Chip Resistor, Body 1.6x0.8mm, IPC Medium Density"
  rect 0.9x1 smd: 1(-0.85,0) 2(0.85,0)
  silkscreen extent -0.2,-0.4 0.2,0.4, body extent -0.85,-0.48 0.85,0.48, height 0.6
reset [mil]
  rect 50x80 smd: 1(0,0) 2(0,-350) 3(180,0) 4(180,-350)
  silkscreen extent -50,-300 225,-50, body extent -50,-300 225,-50, height 197
SHF-105-01-L-D-SM [mil] "Samtec SHROUDED HEADER FOR FFSD, Pitch 1.27mm, Surface Mounted"
  rect 29x110 smd mask+2: 1(-100,-80) 2(-100,80) 3(-50,-80) 4(-50,80) 5(0,-80) 6(0,80) 7(50,-80) 8(50,80) 9(100,-80) 10(100,80)
  silkscreen extent -250,-100 250,120, body extent -250,-120 250,120, height 215
SO8_N [mm] "SOIC, 8-Leads, Body 4.9x3.9mm, Pitch 1.27mm, IPC Medium Density"
  oval 2.2x0.6 smd: 1(-2.4,1.905) 2(-2.4,0.635) 3(-2.4,-0.635) 4(-2.4,-1.905) 5(2.4,-1.905) 6(2.4,-0.635) 7(2.4,0.635) 8(2.4,1.905)
  silkscreen extent -2.53,-2.5 0.9,2.88, body extent -2,-2.5 2,2.5, height 1.75
SOT23-6_M [mm] "SOT23, 6-Leads, Body 2.9x1.6mm, Pitch 0.95mm, Lead Span 2.7mm, IPC Low Density"
  rect 1.3x0.7 smd: 1(-1.2,0.95) 2(-1.2,0) 3(-1.2,-0.95) 4(1.2,-0.95) 5(1.2,0) 6(1.2,0.95)
  silkscreen extent -1.32,-1.55 0.15,1.98, body extent -0.9,-1.55 0.9,1.55, height 1.45
SOT223_N [mm] "SOT223, 4-Leads, Body 6.5x3.5mm, Pitch 2.3mm, Lead Span 7mm, IPC Medium Density"
  rect 2.4x1 smd: 1(-2.9,2.3) 2(-2.9,0) 3(-2.9,-2.3)
  rect 2.4x3.3 smd: 4(2.9,0)
  silkscreen extent -3.02,-3.35 1.4,3.47, body extent -1.85,-3.35 1.85,3.35, height 1.7
SSOP-28_N [mm] "SOP, 28-Leads, Body 10.2x5.3mm, Pitch 0.65mm, IPC Medium Density"
  oval 2.1x0.35 smd: 1(-3.45,4.225) 2(-3.45,3.575) 3(-3.45,2.925) 4(-3.45,2.275) 5(-3.45,1.625) 6(-3.45,0.975) 7(-3.45,0.325) 8(-3.45,-0.325) 9(-3.45,-0.975) 10(-3.45,-1.625) 11(-3.45,-2.275) 12(-3.45,-2.925) 13(-3.45,-3.575) 14(-3.45,-4.225) 15(3.45,-4.225) 16(3.45,-3.575) 17(3.45,-2.925) 18(3.45,-2.275) 19(3.45,-1.625) 20(3.45,-0.975) 21(3.45,-0.325) 22(3.45,0.325) 23(3.45,0.975) 24(3.45,1.625) 25(3.45,2.275) 26(3.45,2.925) 27(3.45,3.575) 28(3.45,4.225)
  silkscreen extent -3.57,-5.25 2,5.25, body extent -2.8,-5.25 2.8,5.25, height 2
STM-LQFP64_M [mm] "Thin QFP, 64-Leads, Body 10x10mm, Pitch 0.5mm, IPC Low Density"
  oval 2.1x0.3 smd: 1(-5.6,3.75) 2(-5.6,3.25) 3(-5.6,2.75) 4(-5.6,2.25) 5(-5.6,1.75) 6(-5.6,1.25) 7(-5.6,0.75) 8(-5.6,0.25) 9(-5.6,-0.25) 10(-5.6,-0.75) 11(-5.6,-1.25) 12(-5.6,-1.75) 13(-5.6,-2.25) 14(-5.6,-2.75) 15(-5.6,-3.25) 16(-5.6,-3.75) 33(5.6,-3.75) 34(5.6,-3.25) 35(5.6,-2.75) 36(5.6,-2.25) 37(5.6,-1.75) 38(5.6,-1.25) 39(5.6,-0.75) 40(5.6,-0.25) 41(5.6,0.25) 42(5.6,0.75) 43(5.6,1.25) 44(5.6,1.75) 45(5.6,2.25) 46(5.6,2.75) 47(5.6,3.25) 48(5.6,3.75)
  oval 0.3x2.1 smd: 17(-3.75,-5.6) 18(-3.25,-5.6) 19(-2.75,-5.6) 20(-2.25,-5.6) 21(-1.75,-5.6) 22(-1.25,-5.6) 23(-0.75,-5.6) 24(-0.25,-5.6) 25(0.25,-5.6) 26(0.75,-5.6) 27(1.25,-5.6) 28(1.75,-5.6) 29(2.25,-5.6) 30(2.75,-5.6) 31(3.25,-5.6) 32(3.75,-5.6) 49(3.75,5.6) 50(3.25,5.6) 51(2.75,5.6) 52(2.25,5.6) 53(1.75,5.6) 54(1.25,5.6) 55(0.75,5.6) 56(0.25,5.6) 57(-0.25,5.6) 58(-0.75,5.6) 59(-1.25,5.6) 60(-1.75,5.6) 61(-2.25,5.6) 62(-2.75,5.6) 63(-3.25,5.6) 64(-3.75,5.6)
  silkscreen extent -5.72,-4.15 4.15,4.57, body extent -5,-5 5,5, height 1.6
TestPoint [mm] "Testpoint   Diameter 1.2mm"
  round 1.2 smd: 1(0,0)
TO-263_M [mm] "D2-PAK, 4-Leads, Body 9.2x10.2mm, Pitch 2.54mm, Lead Span 15.4mm, IPC Low Density"
  rect 4.1x1.05 smd: 1(-6.35,2.54) 3(-6.35,-2.54)
  rect 9.6x10.45 smd: 4(3.6,0)
  silkscreen extent -6.47,-5.2 -1.6,5.2, body extent -2.9,-5.2 6.45,5.2, height 4.6
TQG144_L [mm] "Thin QFP, 144-Leads, Body 20x20mm, Pitch 0.5mm, IPC High Density"
  oval 1.55x0.25 smd: 1(-10.525,8.75) 2(-10.525,8.25) 3(-10.525,7.75) 4(-10.525,7.25) 5(-10.525,6.75) 6(-10.525,6.25) 7(-10.525,5.75) 8(-10.525,5.25) 9(-10.525,4.75) 10(-10.525,4.25) 11(-10.525,3.75) 12(-10.525,3.25) 13(-10.525,2.75) 14(-10.525,2.25) 15(-10.525,1.75) 16(-10.525,1.25) 17(-10.525,0.75) 18(-10.525,0.25) 19(-10.525,-0.25) 20(-10.525,-0.75) 21(-10.525,-1.25) 22(-10.525,-1.75) 23(-10.525,-2.25) 24(-10.525,-2.75) 25(-10.525,-3.25) 26(-10.525,-3.75) 27(-10.525,-4.25) 28(-10.525,-4.75) 29(-10.525,-5.25) 30(-10.525,-5.75) 31(-10.525,-6.25) 32(-10.525,-6.75) 33(-10.525,-7.25) 34(-10.525,-7.75) 35(-10.525,-8.25) 36(-10.525,-8.75) 73(10.525,-8.75) 74(10.525,-8.25) 75(10.525,-7.75) 76(10.525,-7.25) 77(10.525,-6.75) 78(10.525,-6.25) 79(10.525,-5.75) 80(10.525,-5.25) 81(10.525,-4.75) 82(10.525,-4.25) 83(10.525,-3.75) 84(10.525,-3.25) 85(10.525,-2.75) 86(10.525,-2.25) 87(10.525,-1.75) 88(10.525,-1.25) 89(10.525,-0.75) 90(10.525,-0.25) 91(10.525,0.25) 92(10.525,0.75) 93(10.525,1.25) 94(10.525,1.75) 95(10.525,2.25) 96(10.525,2.75) 97(10.525,3.25) 98(10.525,3.75) 99(10.525,4.25) 100(10.525,4.75) 101(10.525,5.25) 102(10.525,5.75) 103(10.525,6.25) 104(10.525,6.75) 105(10.525,7.25) 106(10.525,7.75) 107(10.525,8.25) 108(10.525,8.75)
  oval 0.25x1.55 smd: 37(-8.75,-10.525) 38(-8.25,-10.525) 39(-7.75,-10.525) 40(-7.25,-10.525) 41(-6.75,-10.525) 42(-6.25,-10.525) 43(-5.75,-10.525) 44(-5.25,-10.525) 45(-4.75,-10.525) 46(-4.25,-10.525) 47(-3.75,-10.525) 48(-3.25,-10.525) 49(-2.75,-10.525) 50(-2.25,-10.525) 51(-1.75,-10.525) 52(-1.25,-10.525) 53(-0.75,-10.525) 54(-0.25,-10.525) 55(0.25,-10.525) 56(0.75,-10.525) 57(1.25,-10.525) 58(1.75,-10.525) 59(2.25,-10.525) 60(2.75,-10.525) 61(3.25,-10.525) 62(3.75,-10.525) 63(4.25,-10.525) 64(4.75,-10.525) 65(5.25,-10.525) 66(5.75,-10.525) 67(6.25,-10.525) 68(6.75,-10.525) 69(7.25,-10.525) 70(7.75,-10.525) 71(8.25,-10.525) 72(8.75,-10.525) 109(8.75,10.525) 110(8.25,10.525) 111(7.75,10.525) 112(7.25,10.525) 113(6.75,10.525) 114(6.25,10.525) 115(5.75,10.525) 116(5.25,10.525) 117(4.75,10.525) 118(4.25,10.525) 119(3.75,10.525) 120(3.25,10.525) 121(2.75,10.525) 122(2.25,10.525) 123(1.75,10.525) 124(1.25,10.525) 125(0.75,10.525) 126(0.25,10.525) 127(-0.25,10.525) 128(-0.75,10.525) 129(-1.25,10.525) 130(-1.75,10.525) 131(-2.25,10.525) 132(-2.75,10.525) 133(-3.25,10.525) 134(-3.75,10.525) 135(-4.25,10.525) 136(-4.75,10.525) 137(-5.25,10.525) 138(-5.75,10.525) 139(-6.25,10.525) 140(-6.75,10.525) 141(-7.25,10.525) 142(-7.75,10.525) 143(-8.25,10.525) 144(-8.75,10.525)
  silkscreen extent -10.65,-9.35 9.35,9.55, body extent -10,-10 10,10, height 1.6
USR-K [mil]
  rect 70x50 hole 35: 1(0,0)
  oval 70x50 hole 35: 2(0,-80) 3(0,-160) 4(0,-240) 5(0,-320) 6(0,-400) 7(-100,40) 8(-100,-40) 9(-100,-120) 10(-100,-280) 11(-100,-360) 12(-100,-440)
  round 70 hole 43: 13(-200,40) 14(-200,-60) 15(-200,-340) 16(-200,-440)
  round 101.18 hole 61.81: 17(725,117.5) 18(725,-517.5)
  silkscreen extent -270,-577 1030,192
UWT1E471MNL1GS [mm] "铝质电解电容器  10x10  25V 470uF"
  rect 3.5x2 smd: 1(-3.9,0) 2(3.9,0)
  silkscreen extent -5,-5 5,5, body extent -4.96,-4.99 5,4.99, height 10
WE-HCC-1090 [mm] "Inductor, 2-Leads, Body 10.9 x 10.0 mm"
  rect 2.3x3.6 smd: 1(-4.6,0) 2(4.6,0)
  silkscreen extent -5.7,-5.2 5.7,5.2, body extent -5.13,-5 5.13,5, height 9.29
XH2.54-2P [mm]
  rect 1.9x1.9 hole 1: 1(-1.27,0)
  round 1.9 hole 1: 2(1.27,0)
  silkscreen extent -3.81,-2.1 3.81,3.1, body extent -3.84,-2.08 3.81,3.1, height 10
XH2.54-4PIN [mm]
  rect 1.9x1.9 hole 1: 1(-3.81,0)
  round 1.9 hole 1: 2(-1.27,0) 3(1.27,0) 4(3.81,0)
  silkscreen extent -6.35,-2.1 6.35,3.1, body extent -6.38,-2.16 6.35,3.1, height 10
XTAL_ABRACON_ABM3B [mm] "ABM3B Serie, SMD Cristal, Body 5.x3.2mm"
  rect 1.2x1.8 smd: 1(-1.2,2) 2(-1.2,-2) 3(1.2,-2) 4(1.2,2)
  silkscreen extent -2.45,-2.55 1.65,2.62, body extent -1.65,-2.55 1.65,2.55, height 1.1

## Part data
C1 C3 C5 C6 C8 C9 C11 C12 C14 C77 C94 C304: library part "Cap Pol3", "Polarized Capacitor (Surface Mount)"
C2 C31 C32 C33 C34 C35 C36 C37 C38 C39 C40 C41 C42 C43 C44 C45 C46 C47 C48 C49 C50 C51 C52 C53 C54 C55 C107 C152: library part "Cap Semi", "Capacitor (Semiconductor SIM Model)"
C4 C7 C10 C13 C15 C16 C17 C18 C19 C20 C21 C22 C24 C25 C26 C27 C28 C29 C30 C56 C57 C58 C59 C60 C62 C63 C64 C65 C66 C67 C68 C69 C70 C71 C72 C73 C74 C75 C76 C78 C79 C80 C81 C82 C83 C84 C85 C86 C87 C88 C89 C90 C91 C92 C93 C95 C96 C97 C98 C99 C100 C101 C102 C103 C104 C105 C106 C300 C302 C303 C305 C306 C307 C308 C309: "Capacitor"
C23: library part Cap2, "Capacitor"
D300 D301: library part "Diode 1N4148", "High Conductance Fast Diode"
F1 F2: library part "Fuse 2", "Fuse"
F300: library part LFUS-30R800, "PPTC Fuse 30R800"
FB1: library part CMP-0686-00259-2, "Chip Ferrite Bead for Power Lines, 600 Ohm, 900 mA, -55 to 125 degC, 1 x 0.5 x 0.55 mm SMD, Tape and Reel"
FB2 FB3: library part Inductor, "Ferrite Bead"
FL_Sensor FR_Sensor: "Header, 5-Pin, Dual row"
FL_Sensor1 FR_Sensor1: library part CMP-1505-00403-1, "Elbow receptacle for printed circuit with two nuts (solder or screw fixing, back panel mounting), Key (G), 1B series, Multipole Type with 10 Contacts"
GripL_Sensor GripR_Sensor: "Header, 4-Pin"
GripL_Sensor1 GripR_Sensor1: library part CMP-1505-00379-1, "Elbow receptacle for printed circuit with two nuts (solder or screw fixing, back panel mounting), Key (G), 0B series, Multipole Type with 4 Contacts"
J1 P300 PAD: library part "Header 2", "Header, 2-Pin"
J2: library part 787780-1, "USB 1.1, Right Angle, Thru-Hole, B Type, Receptacle, 4 Position, Black"
JTAG1: ".NETMF"
L1: "Common mode inductor"
L300: library part CMP-0226-00114-1, "SMD High Current Cube Inductor WE-HCC, L=8.20 μH"
LED1 PWR1 STATUS1: library part LED2, "Typical RED, GREEN, YELLOW, AMBER GaAs LED"
NipL_Sensor NipR_Sensor: "Header, 2-Pin"
NipL_Sensor1 NipR_Sensor1: library part CMP-1505-00375-1, "Elbow receptacle for printed circuit with two nuts (solder or screw fixing, back panel mounting), Key (G), 0B series, Multipole Type with 2 Contacts"
R1 VR300: library part "Res Varistor", "Varistor (Voltage-Sensitive Resistor)"
R2 R3 R4 R5 R6 R7 R8 R9 R10 R11 R12 R13 R14 R17 R18 R19 R20 R21 R37 R44 R51 R58 R65 R72 R79 R86 R93 R100 R107 R114 R121 R128 R135 R142 R300 R301 R302 R303: library part Res3, "Resistor"
R15 R16 R22 R23 R24 R25 R26 R27 R28 R29 R30 R31 R32 R33 R34 R35 R36 R38 R39 R40 R41 R42 R43 R45 R46 R47 R48 R49 R50 R52 R53 R54 R55 R56 R57 R59 R60 R61 R62 R63 R64 R66 R67 R68 R69 R70 R71 R73 R74 R75 R76 R77 R78 R80 R81 R82 R83 R84 R85 R87 R88 R89 R90 R91 R92 R94 R95 R96 R97 R98 R99 R101 R102 R103 R104 R105 R106 R108 R109 R110 R111 R112 R113 R115 R116 R117 R118 R119 R120 R122 R123 R124 R125 R126 R127 R129 R130 R131 R132 R133 R134 R136 R137 R138 R139 R140 R141 R143 R144 R145 R146 R147 R148 R149 R150 R151 R152 R153 R154 R155 R156 R157 R158 R159 R160: library part Res2, "Resistor"
TP1: library part TP
U1: library part ATC30-5S, "AC-DC  INPUT 100-277Vac 0.6A 50/60Hz  OUTPUT +5V 5A"
U2 U3 U4 U5: library part CMP-0244-00169-1, "3A, Low Drop Positive Voltage Regulator, 3.3V, 3-Pin D2PAK"
U6: library part CMP-0243-00019-3, "ARM Cortex-M4 32-bit MCU+FPU, 210 DMIPS, 1024 kB Flash, 192 kB Internal RAM, 51 I/Os, 64-pin LQFP, -40 to 85 degC, Tray"
U7: library part FT232RL-Tube, "USB UART Asynchronous Serial Data Transfer Chip, SSOP-28, Tube"
U8: library part CMP-0067-00447-1, "Spartan-6 LX 1.2V FPGA, 102 User I/Os, 144-Pin TQFP (0.5mm Pitch), Speed Grade 2, Industrial Grade, Pb-Free"
U9: library part S25FL032P
U10: library part "NX1117C/CE Fixed"
U11: library part ASDMB-32.000MHZ-LC-T
U12 U14 U16 U18 U20 U22 U24 U26 U28 U30 U32 U34 U36 U38 U40 U42: "1-? SPDT Analog Switch"
U13 U15 U17 U19 U21 U23 U25 U27 U29 U31 U33 U35 U37 U39 U41 U43: "QUAD Analog Switchers"
X_Debug1: library part "Gadgeteer Socket", ".NETMF"
Y1: library part XTAL_12MHZ_ABRACON_ABM3B-12.000MHZ-B2-T, "Crystal 4 pins 1=XTAL Control 2=GND3=XTAL 4=GND"

## Free pads (board coordinates)
  rect 47.24x60 smd: 0(2420,4263)
  round 137.8 hole 137.8: 0(4733,5682) 0(7200,5269) 1(7677.17,196.85) 3(196.85,3110.24) 3(6818,3585) 6(3795.01,2179.85) 6(3937.01,196.85) 7(356,302)
  rect 47.24x118.11 smd: 1(2420.17,4602)

## Via types
v1: diameter 25, hole 15, Top Layer to Bottom Layer, 584 vias
v2: diameter 20, hole 10, Top Layer to Bottom Layer, 130 vias
v3: diameter 30, hole 20, Top Layer to Bottom Layer, 103 vias
v4: diameter 50, hole 35, Top Layer to Bottom Layer, 11 vias
v5: diameter 100, hole 60, Top Layer to Bottom Layer, 7 vias
v6: diameter 50, hole 30, Top Layer to Bottom Layer, 4 vias
v7: diameter 40, hole 30, Top Layer to Bottom Layer, 4 vias
v8: diameter 19.68, hole 7.87, Top Layer to Bottom Layer, 4 vias
v9: diameter 80, hole 50, Top Layer to Bottom Layer, 2 vias
v10: diameter 133.86, hole 133.86, Top Layer to Bottom Layer, 2 vias
v11: diameter 35, hole 15, Top Layer to Bottom Layer, 1 vias
v12: diameter 60, hole 40, Top Layer to Bottom Layer, 1 vias
v13: diameter 20, hole 15, Top Layer to Bottom Layer, 1 vias

## Nets (pads, with @x,y where several pads share a name; then routed paths per layer and width w, separated by ;. In a path a pad name is that pad's centre, name@x,y a point inside that pad or via, vN(x,y) a via of type N, cw(c..) or ccw(c..) an arc to the next point about the centre after c; other vN are vias at no path point)
AWAKE: U8.75
CLK0: R36.1 U8.55 | length 359.8
  Top Layer w10: U8.55@5710.37,2863.84 6064.62,2863.84 6065,2863.46 R36.1@6070,2863.46
CSO_B: R32.1 U8.38 U9.1 | length 1505.1
  Top Layer w10: U8.38@5710.37,2529.2 5780.8,2529.2 5830,2480 6790,2480 6858.46,2548.46 R32.1@6858.46,2615
  Top Layer w20: U9.1@6717.49,2750 6800,2750 6858.46,2691.54 R32.1@6858.46,2615
CTS: U8.92
CTS1: J3.5 U6.44 | length 2488.6
  Top Layer w10: v2(4698,4286) 4719,4265 4890,4265 4917.1,4292.1 U6.44@5186.53,4292.1
  Bottom Layer w10: v2(4698,4286) 4675,4309 4675,5293 4997,5615 5262,5615 J3.5@5434,5443
CTS3: U6.34
D-: J2.2 L1.1 | length 293.3
  Top Layer w8: J2.2@6794.21,5873.63 6794.21,5825.79 6834.49,5785.51 L1.1@7022.95,5785.51
DONE: LED1.1 R28.1 U8.71 | length 319.7
  Top Layer w10: U8.71@5710.37,3178.8 5813.8,3178.8 5845,3210 R28.1@5886.54,3210 5886.54,3338.46 LED1.1@5885,3340
F\P\G\A\_\E\N\: U6.26 U8.102 | length 1854.6
  Top Layer w10: U8.102@5069.62,3268.37 5069.62,3374.62 5135,3440 5135,3705 5175,3745 5175,4100 v2(5115,4160) ; v2(5365,4710) 5370,4710 5377.47,4702.53 U6.26@5377.47,4581.47
  Bottom Layer w10: v2(5115,4160) 5115,4638 5150,4673 5303,4673 5340,4710 v2(5365,4710)
F\P\G\A\_\R\S\T\: U6.27 U8.104 | length 1891.4
  Top Layer w10: U8.104@5030.25,3268.37 5030.25,3389.75 5015,3405 5015,3635 5145,3765 5145,4075 5075,4145 v2(5075,4165)
  Top Layer w11.81: v2(5315,4720) 5357.79,4677.21 U6.27@5357.79,4581.47
  Bottom Layer w10: v2(5075,4165) 5075,4642.09 5125,4692.09 5262.09,4692.09 5290,4720 v2(5315,4720)
FL_CON0: C56.2 FL_Sensor1.1 FL_Sensor.1 U13.6 | length 3849.6
  Top Layer w20: C56.2@235.6,1240 234.27,1241.32 U13.6@234.27,1388.51 234.27,1450.73 220,1465 140,1465 100,1425 100,690 252,538 253,539 v3(508,539)
  Bottom Layer w20: FL_Sensor1.1@1052.36,472.83 1052.36,502.64 1016,539 v3(508,539) 508,493 546,455 546,323 818,51 1797.06,51 FL_Sensor.1@1861.02,114.96
FL_CON1: FL_Sensor1.2 FL_Sensor.2 U12.4 | length 2456.8
  Top Layer w20: U12.4@220.6,739.76 220.6,639.4 270,590 525,590 594,521 v3(594,418)
  Bottom Layer w20: v3(594,418) 594,350 854,90 1736.06,90 FL_Sensor.2@1761.02,114.96 ; v3@594,420 1005.2,420 FL_Sensor1.2@1052.36,372.83
FL_CON2: C57.2 FL_Sensor1.3 FL_Sensor.3 U15.6 | length 2881.1
  Top Layer w20: v3(642,372) 642,547 575,614 575,1425 625,1475 695,1475 709,1461 U15.6@709,1388.51 709,1240.6 C57.2@709.6,1240
  Bottom Layer w20: v3(642,372) 691.17,322.83 FL_Sensor1.3@1002.36,322.83 1002.36,224.64 1105,122 1600,122 1643,165 1811.06,165 FL_Sensor.3@1861.02,214.96
FL_CON3: FL_Sensor1.4 FL_Sensor.4 U14.4 | length 1642.8
  Top Layer w20: U14.4@690.6,739.76 690.6,334.4 752.17,272.83 FL_Sensor1.4@1052.36,272.83 1052.36,227.64 1175,105 1290,105 1399.96,214.96 FL_Sensor.4@1761.02,214.96
FL_CON4: C58.2 FL_Sensor1.5 FL_Sensor.5 U17.6 | length 2629.3
  Top Layer w20: FL_Sensor1.5@1152.36,272.83 1252.83,272.83 1355,375 1355,475 1290,540 1130,540 1040,630 1040,1415 1100,1475 1155,1475 1179.27,1450.73 U17.6@1179.27,1388.51 1179.27,1244.32 C58.2@1183.6,1240
  Bottom Layer w20: FL_Sensor1.5@1152.36,272.83 1161.2,264 1810.06,264 FL_Sensor.5@1861.02,314.96
FL_CON5: FL_Sensor1.6 FL_Sensor.6 U16.4 | length 1179.2
  Top Layer w20: U16.4@1126.6,739.76 1125,738.16 1125,630 1170,585 1320,585 1395,510 v3(1395,322.83)
  Bottom Layer w20: FL_Sensor1.6@1202.36,322.83 1753.15,322.83 FL_Sensor.6@1761.02,314.96
FL_CON6: C59.2 FL_Sensor1.7 FL_Sensor.7 U19.6 | length 2149.2
  Top Layer w20: v3(1465,370) 1465,1415 1525,1475 1565,1475 1594,1446 U19.6@1594,1388.51 1594,1241.4 C59.2@1592.6,1240
  Bottom Layer w20: FL_Sensor1.7@1152.36,372.83 1345,372.83 1351.83,366 1812.06,366 FL_Sensor.7@1861.02,414.96
FL_CON7: FL_Sensor1.8 FL_Sensor.8 U18.4 | length 988.3
  Top Layer w20: U18.4@1539.32,739.76 1539.32,544.32 v3(1520,525) 1520,420 1559,381 1727.06,381 FL_Sensor.8@1761.02,414.96
  Bottom Layer w20: FL_Sensor1.8@1152.36,472.83 1204.53,525 v3(1520,525)
FL_CON8: C60.2 FL_Sensor1.9 FL_Sensor.9 U21.6 | length 2278.8
  Top Layer w20: v3(1585,425) 1585,449 1875,739 1875,1400 1950,1475 1990,1475 2014.27,1450.73 U21.6@2014.27,1388.51 2014.27,1246.68 C60.2@2012.6,1245
  Bottom Layer w20: FL_Sensor1.9@1102.36,422.83 1582.83,422.83 v3(1585,425) 1660,425 1700,465 1811.06,465 FL_Sensor.9@1861.02,514.96
FL_CON9: FL_Sensor1.10 FL_Sensor.10 U20.4 | length 1666.9
  Top Layer w20: FL_Sensor1.10@1102.36,322.83 1102.36,242.64 1120,225 1327,225 1368,266 1912,266 1959.13,313.13 1959.13,605 ; FL_Sensor.10@1761.02,514.96 1761.02,556.02 1799,594 1948.13,594 1959.13,605 ; U20.4@1959.13,739.76 1959.13,605
FL_SENSOR1: R15.2 U6.36 U8.111 | length 7400.5
  Top Layer w10: R15.2@455,1788.46 548.46,1788.46 800,2040 2485,2040 3025,2580 3900,2580 4045,2725 4045,3520 4125,3600 4180,3600 ; U8.111@4881.63,3159.12 4815.88,3159.12 4375,3600 4180,3600 ; U6.36@5186.53,4449.58 4659.58,4449.58 4180,3970 4180,3600
FL_SENSOR2: R16.2 U6.55 U8.112 | length 6808.2
  Top Layer w10: R16.2@920,1788.46 920,1885 1040,2005 2515,2005 3055,2545 3935,2545 4080,2690 4080,3495 4130,3545 v2(4375,3545) 4395,3545 4800.57,3139.43 U8.112@4881.63,3139.43 ; v2(4375,3635) 4687,3947 5063,3947 v2(5065,3945) ; U6.55@5377.47,4140.53 5377.47,4000.03 5385,3992.5 v2(5385,3955)
  Bottom Layer w10: v2(4375,3545) v2(4375,3635) ; v2(5065,3945) 5375,3945 v2(5385,3955)
FL_SENSOR3: R22.2 U6.29 U8.114 | length 7018
  Top Layer w10: R22.2@1370,1788.46 1433.46,1788.46 1615,1970 2560,1970 3100,2510 3980,2510 4120,2650 v2(4120,3490) 4420,3490 4809.94,3100.06 U8.114@4881.63,3100.06 ; v2(4120,3670) 4120,4015 4845,4740 v2(5065,4740) ; v2(5260,4740) 5318.42,4681.58 U6.29@5318.42,4581.47
  Bottom Layer w10: v2(4120,3490) v2(4120,3670) ; v2(5065,4740) v2(5260,4740)